# Altium PCB OBDII-Ist.PcbDoc
Units mm, origin at the board's own origin, x right, y up, seen from the top; angles counter-clockwise.
Board outline 40.1 x 40.1 mm, 2 copper layers (Top, Bottom); 68 components, 62 nets, 280 pads, 52 vias.
Unrouted connection lines stored in the file: 5.
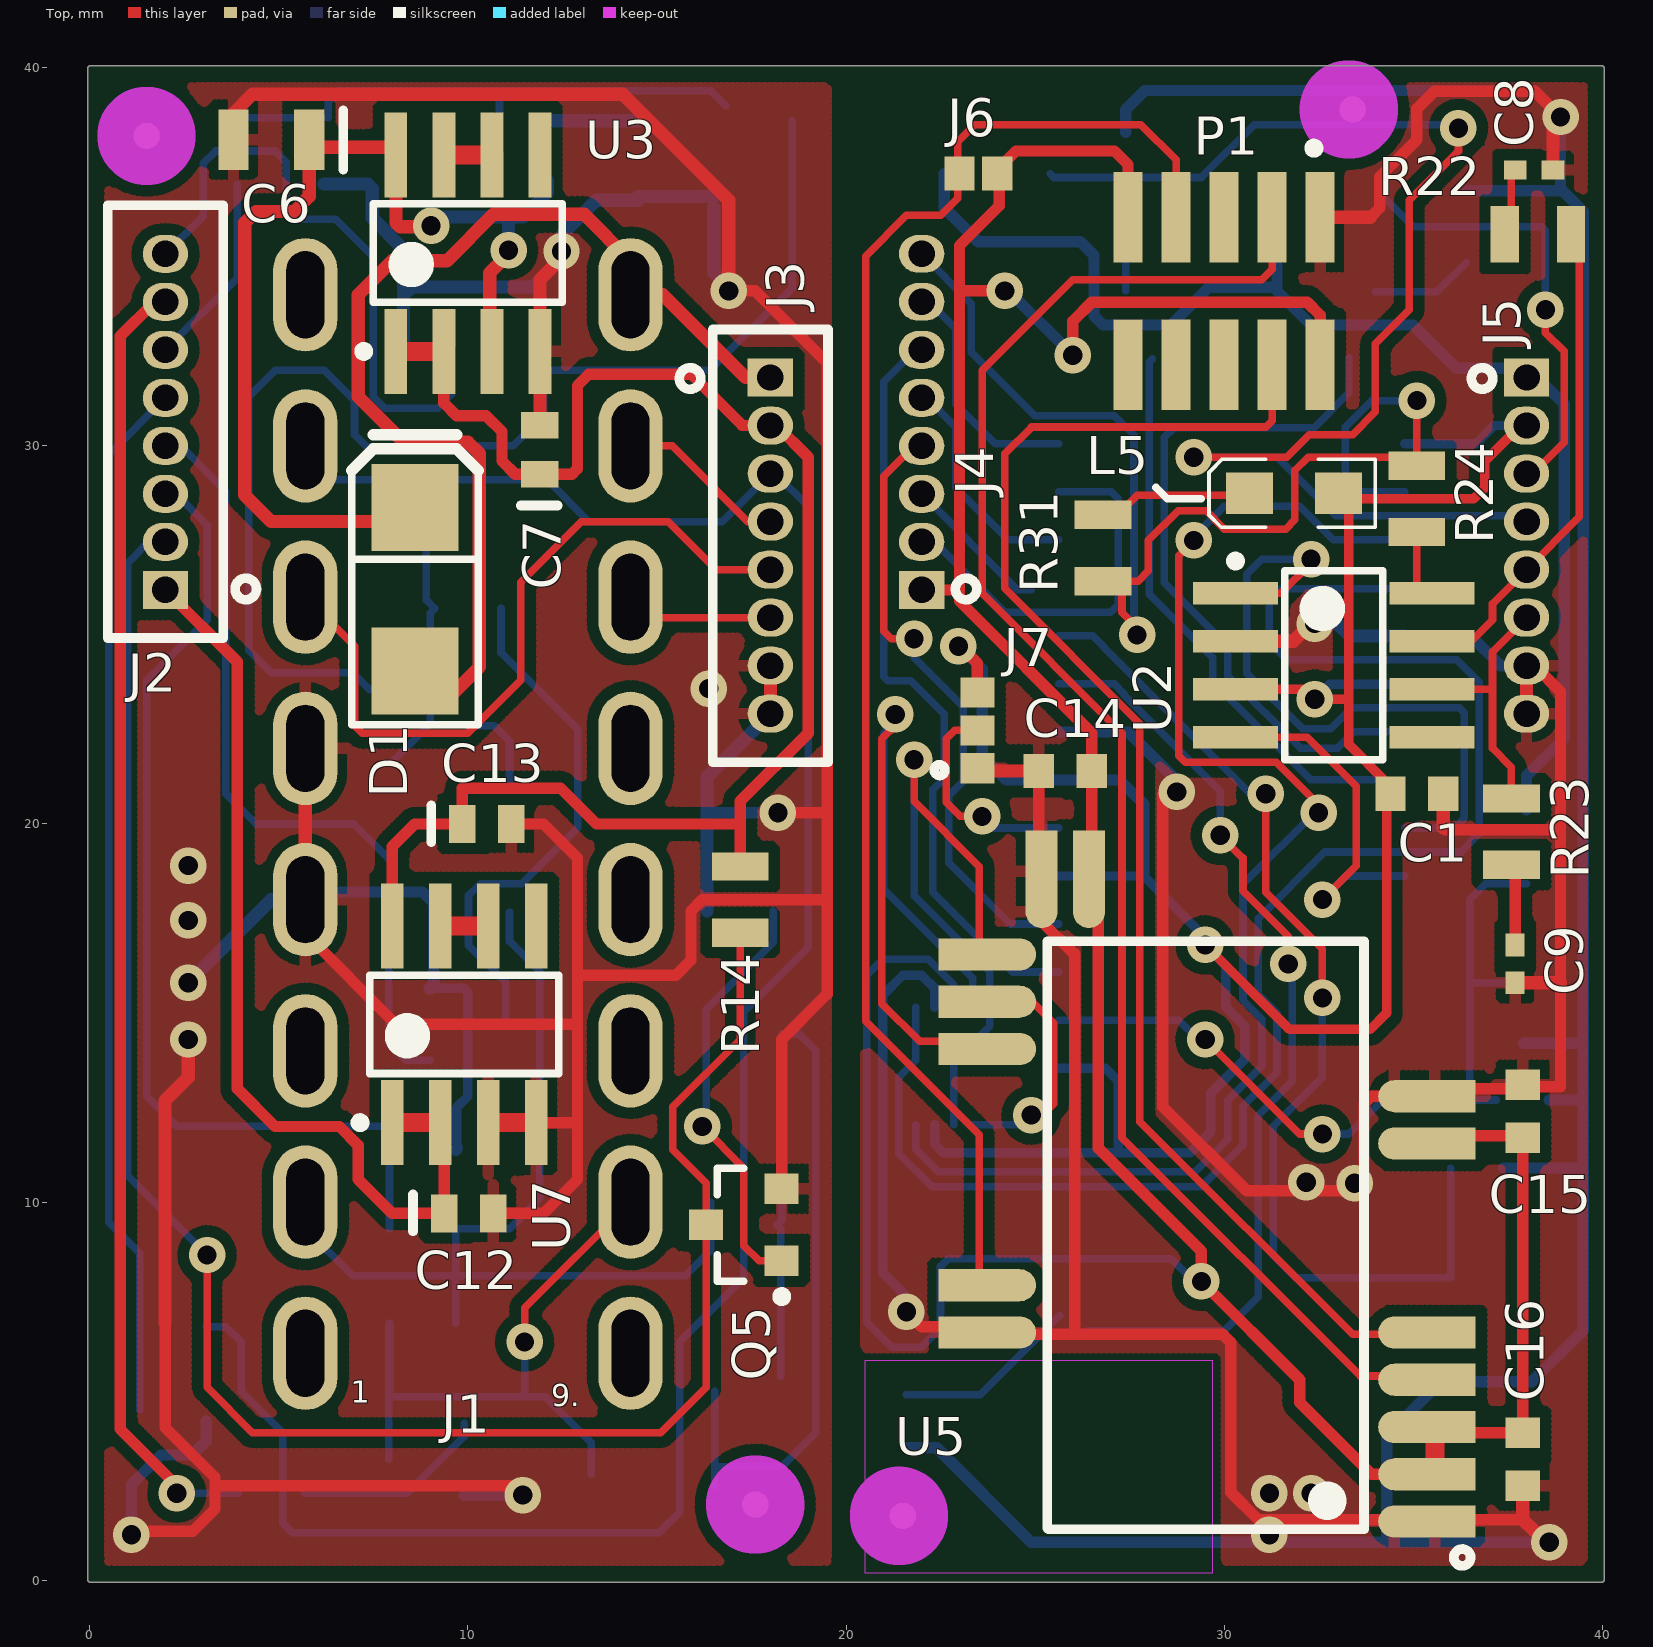
[diagram p0: Top view]
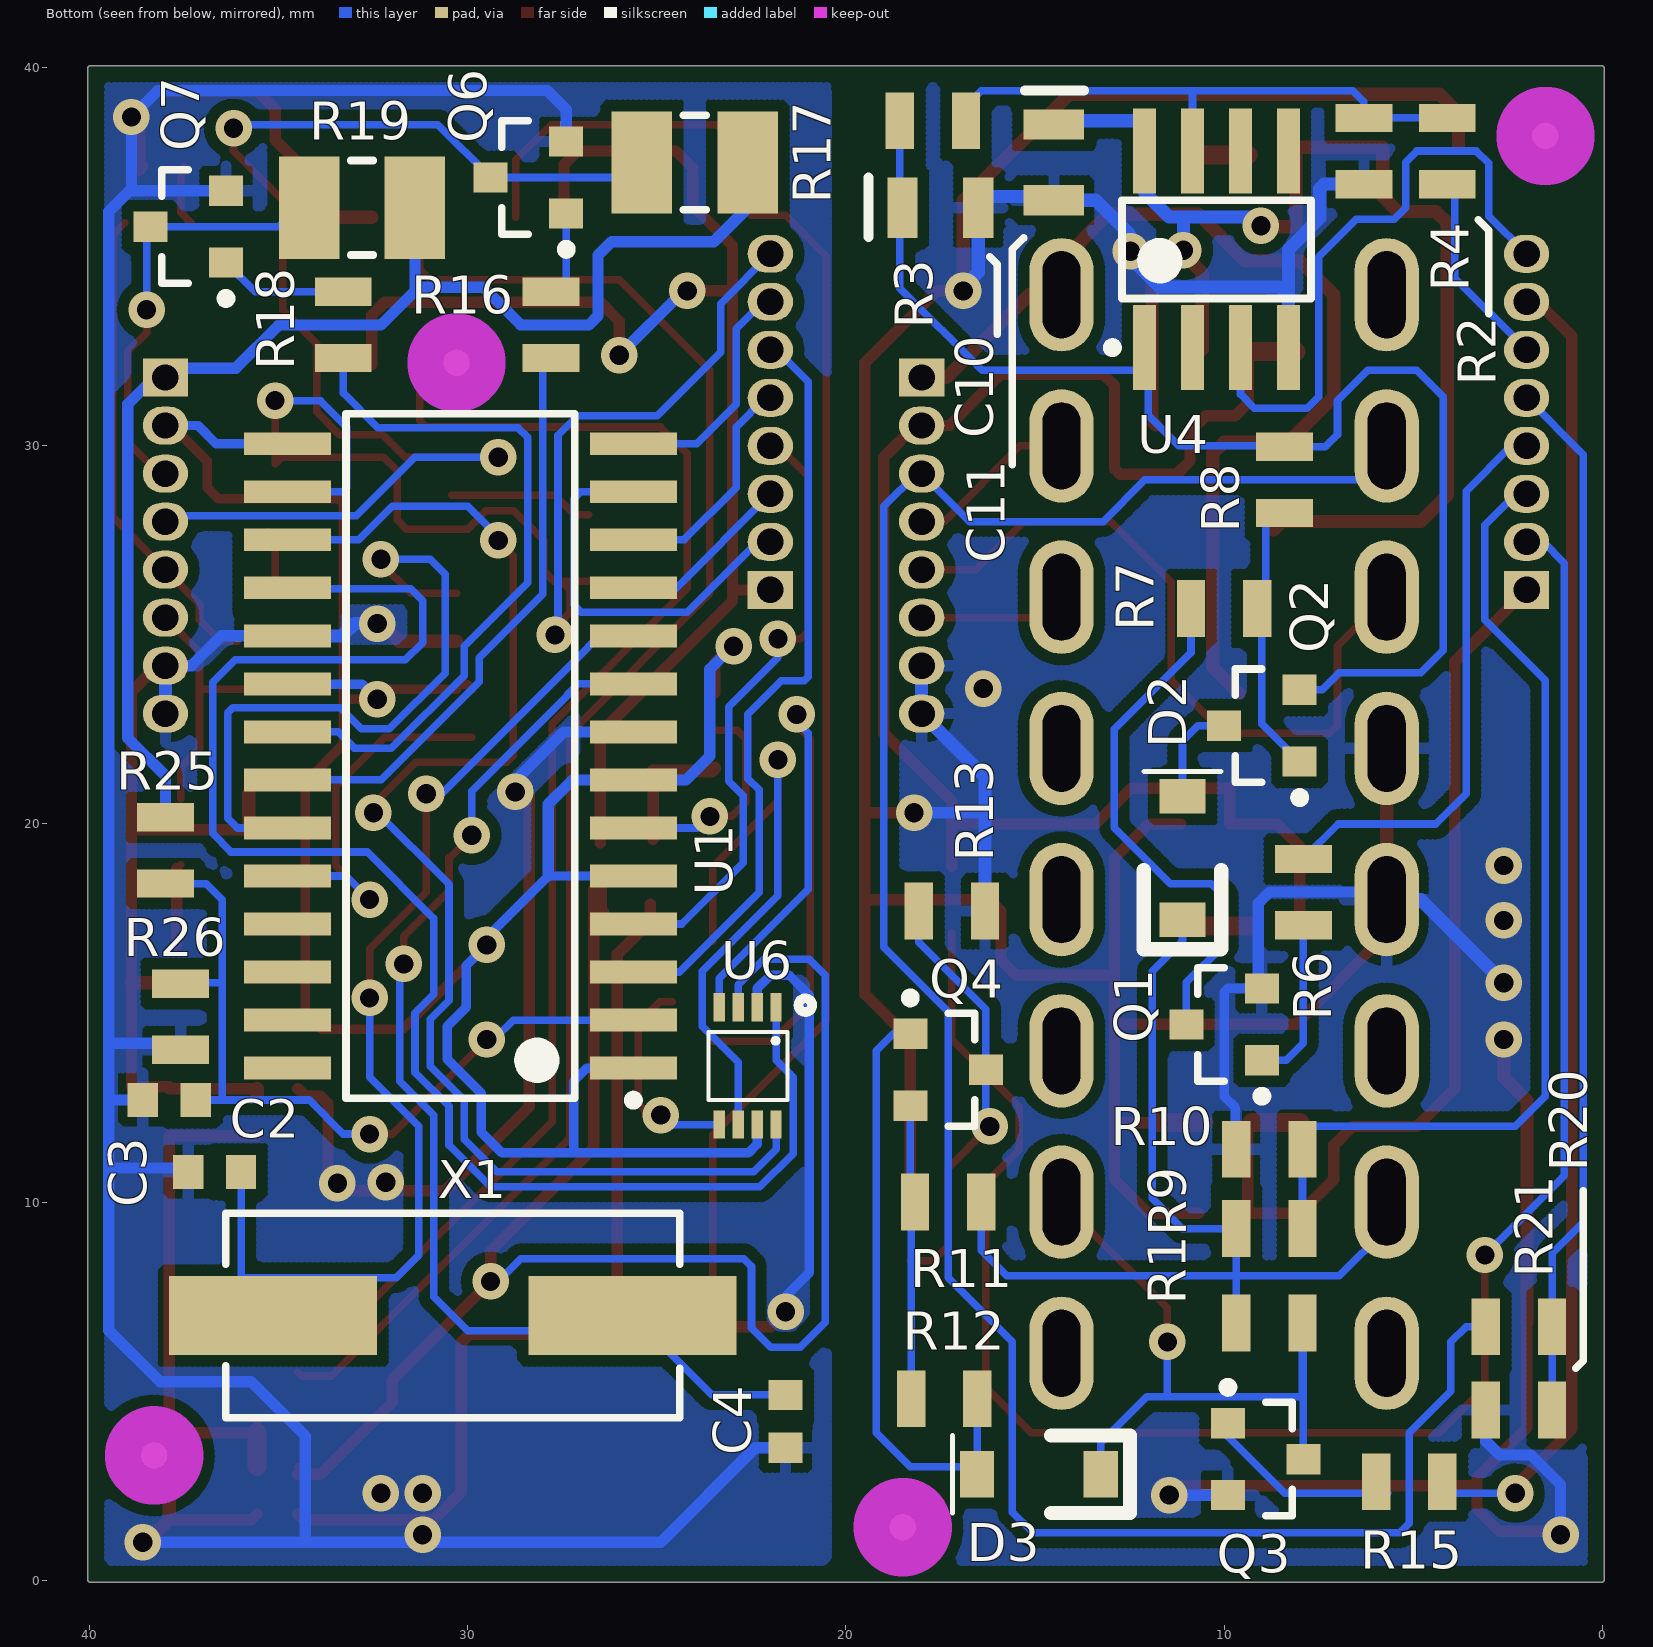
[diagram p1: Bottom view, seen from below]

## Layer stack, top to bottom
Top: signal copper 0.0356
Dielectric: core 0.32, FR-4, Dk 4.8
Bottom: signal copper 0.0356

## Board outline
0,-0.05 cw(c0,0) -0.05,0 -0.05,40 cw(c0,40) 0,40.05 40,40.05 cw(c40,40) 40.05,40 40.05,0 cw(c40,0) 40,-0.05

## Design rules (kind name [scope] priority, off if disabled: settings)
Clearance Clearance_PoligonGND_All [--InPoly vs --(IsPad Or IsTrack or IsVia  Or IsArc)] p1: gap=0.3
Clearance [All] p2: gap=0.2
PlaneConnect [All] p1: planeconnectstyle=Relief reliefexpansion=0.508 reliefentries=4 reliefconductorwidth=0.3 reliefairgap=0.3
PolygonConnect PolygonConnect_1 [IsVia vs InNet('GND')] p1: connectstyle=Direct reliefconductorwidth=0.254 reliefentries=4 polygonreliefangle="90 Angle" airgapwidth=0.254
PolygonConnect [All] p2: connectstyle=Relief reliefconductorwidth=0.3 reliefentries=4 polygonreliefangle="90 Angle" airgapwidth=0.254
RoutingVias [All] p1: holewidth=0.711 width=1.27 viastyle="Through Hole" minholewidth=0.711 minwidth=1.27 maxholewidth=0.711 maxwidth=1.27
SilkscreenOverComponentPads [All] p1: minsilkscreentomaskgap=0.254
SolderMaskExpansion [All] p1: expansion=0.102
Width Width_+5V [InNet('+5V')] p1: maxlimit=0.3 minlimit=0.2 preferedwidth=0.3
Width Width_12V [InNet('+12V')] p2: maxlimit=0.35 minlimit=0.2 preferedwidth=0.35
Width Width_GND [InNet('GND')] p3: maxlimit=0.35 minlimit=0.2 preferedwidth=0.35
Width Width_VBAT [InNet('VBAT')] p4: maxlimit=0.35 minlimit=0.2 preferedwidth=0.35
Width [All] p5: maxlimit=0.3 minlimit=0.2 preferedwidth=0.2
26 further rules are at their usual default settings.

## Classes and differential pairs
component class Power_: C6 C7 C10 C11 C12 C13 D1 D2 D3 J1 J2 J3 Q1 Q2 Q3 Q4 Q5 R1 R2 R3 R4 R6 R7 R8 R9 R10 R11 R12 R13 R14 R15 R20 R21 U3 U4 U7
component class OBDII-Ist: C1 C2 C3 C4 C8 C9 C14 C15 C16 J4 J5 J6 J7 L5 P1 Q6 Q7 R16 R17 R18 R19 R22 R23 R24 R25 R26 R31 U1 U2 U5 U6 X1

## Components (designator, comment, footprint, x,y, rotation, side; value= is the part's Value field where it differs from the comment)
C1 "0.1uF 16V" 1608[0603] 35.1,20.8 r0 top
C2 "0.1uF 16V" 1608[0603] 37.9,12.7 r0 bottom
C3 "27pF 50V" 1608[0603] 36.7,10.8 r0 bottom
C4 "27pF 50V" 1608[0603] 21.6,4.2 r270 bottom
C6 "1uF 50V" C1005 4.8,38.103 r180 top
C7 "2.2uF 16V" C0603 11.9,29.9 r90 top
C8 "560pF 50V" 0402 38.2,37.3 r180 top
C9 "560pF 50V" 0402 37.7,16.3 r90 top
C10 "4.7uF 16V" C1005 17.504,36.3 r180 bottom
C11 "1uF 50V" C1005 14.5,37.5 r270 bottom
C12 "2.2uF 16V" C0603 10.021,9.7 r0 top
C13 "1uF 16V" C0603 10.5,20 r0 top
C14 "1uF 16V" 1608[0603] 25.8,21.4 r180 top
C15 "1uF 16V" 1608[0603] 37.9,12.4 r270 top
C16 "1uF 16V" 1608[0603] 37.9,3.2 r90 top
D1 "FM4001W-W" SMA,2.8mm 8.6,26.2 r90 top
D2 "MMSD4148T1G" SOD123 11.1,19.1 r270 bottom
D3 "MMSD4148T1G" SOD123 14.9,2.8 r180 bottom
J1 "DEV-09911" "DEV-09911 - II" 10,20 r270 top
J2 "M52-040023V2045" M52-040023V2045 2,30 r90 top
J3 "M52-040023V2045" M52-040023V2045 18,28 r270 top
J4 "M52-040023V2045" M52-040023V2045_hols 22,30 r90 top
J5 "M52-040023V2045" M52-040023V2045_hols 38,28 r270 top
J6 "Jumper" Jumper 23.5,37.2 r180 top
J7 "Jumper-3" Jumper-3 23.475,22.475 r90 top
L5 "APT2012SYCK" LED-0805 31.85,28.75 r180 top
P1 "#NAME?" 20021521-00010T1LF 30,34.1 r0 top
Q1 "MMBT3904LT1G" SOT23 10,14.7 r0 bottom
Q2 "MMBT3906LT1G" SOT23 9,22.6 r0 bottom
Q3 "MMBT3904LT1G" SOT23 8.9,3.2 r180 bottom
Q4 "MMBT3906LT1G" SOT23 17.3,13.5 r180 bottom
Q5 "MMBT3904LT1G" SOT23 17.3,9.4 r180 top
Q6 "MMBT3904LT1G" SOT23 28.4,37.1 r0 bottom
Q7 "MMBT3904LT1G" SOT23 37.4,35.8 r0 bottom
R1 "22k 0.125" ERA-0805 8.8,6.8 r0 bottom
R2 "47k 0.125" ERA-0805 4.1,37.8 r90 bottom
R3 "22k 0.125" ERA-0805 17.7,38.6 r0 bottom
R4 "4.7k 0.125" ERA-0805 6.3,37.8 r90 bottom
R6 "4.7k 0.125" ERA-0805 7.9,18.2 r90 bottom
R7 "4.7k 0.125" ERA-0805 10,25.7 r0 bottom
R8 "10k 0.125" ERA-0805 8.4,29.1 r90 bottom
R9 "10k 0.125" ERA-0805 8.8,9.3 r0 bottom
R10 "22k 0.125" ERA-0805 8.8,11.4 r180 bottom
R11 "10k 0.125" ERA-0805 17.3,10 r0 bottom
R12 "47k 0.125" ERA-0805 17.4,4.8 r0 bottom
R13 "10k 0.125" ERA-0805 17.2,17.7 r180 bottom
R14 "4.7k 0.125" ERA-0805 17.2,18 r270 top
R15 "4.7k 0.125" ERA-0805 5.1,2.6 r180 bottom
R16 "2.2k 0.125" ERA-0805 27.8,33.2 r270 bottom
R17 "510R 0.5" ERJ-1210 24,37.5 r180 bottom
R18 "2.2k 0.125" ERA-0805 33.3,33.2 r270 bottom
R19 "510R 0.5" ERJ-1210 32.8,36.3 r180 bottom
R20 "47k 0.125" ERA-0805 2.2,6.7 r0 bottom
R21 "33k 0.125" ERA-0805 2.2,4.5 r180 bottom
R22 "100R 0.125" ERA-0805 38.3,35.6 r0 top
R23 "100R 0.125" ERA-0805 37.6,19.8 r90 top
R24 "4.7k 0.125" ERA-0805 35.1,28.6 r90 top
R25 "47k 0.125" ERA-0805 38,19.3 r90 bottom
R26 "10k 0.125" ERA-0805 37.6,14.9 r90 bottom
R31 "470R 0.125" ERA-0805 26.8,27.3 r90 top
U1 "ELM327SM" SOIC-28N 30.2,21.8 r0 bottom
U2 "MCP2551-I/SN" SOIC8N 32.9,24.2 r0 top
U3 "LP2954IM/NOPB" SOIC8N 10,35.1 r90 top
U4 "LP2951ACM-3.3/NOPB" SOIC8N 10.2,35.2 r90 bottom
U5 "BLE112-A" "BLE112-A - II" 29.6,9.1 r180 top
U6 "TXB0102DCUR" TXB0102DCUR 22.6,13.6 r270 bottom
U7 "LP2951ACM-3.3/NOPB" SOIC8N 9.9,14.7 r90 top
X1 "ABLS-4.000MHZ-B2-T" HC-49/US 30.4,7 r180 bottom

## Footprints (in the part's own frame and the unit in brackets; to place one, negate y for a bottom-side part, rotate by r counter-clockwise, add the part's x,y. Pads: shape width x height; smd on the part's side, far side on the other; paste and mask are expansions set on the pad)
0402 [mm] "Chip Capacitor, Body 1.0x0.5mm, IPC High Density"
  rect 0.6x0.5 smd: 1(-0.5,0) 2(0.5,0)
  body extent -0.55,-0.3 0.55,0.3, height 1.3
1608[0603] [mm] "Chip Capacitor, Body 1.6x0.8mm, IPC High Density"
  rect 0.8x0.9 smd: 1(-0.7,0) 2(0.7,0)
  body extent -0.87,-0.48 0.87,0.48, height 1.3
20021521-00010T1LF [mm] "Connector"
  rect 0.76x2.4 smd: 1(2.54,1.95) 2(2.54,-1.95) 3(1.27,1.95) 4(1.27,-1.95) 5(0,1.95) 6(0,-1.95) 7(-1.27,1.95) 8(-1.27,-1.95) 9(-2.54,1.95) 10(-2.54,-1.95)
  silkscreen extent 2.25,3.65 2.5,3.9, body extent -6.25,-2.25 6.25,2.25, height 0.9
"BLE112-A - II" [mm] "BLE112 Bluetooth Smart Module"
  rect 2.15x0.85 smd: 1(-5.975,7.55) 2(-5.975,6.3) 3(-5.975,5.05) 4(-5.975,3.8) 5(-5.975,2.55) 9(-5.975,-2.45) 10(-5.975,-3.7) 22(6.075,-7.45) 23(6.075,-6.2) 24(6.075,-4.95) 29(6.075,1.3) 30(6.075,2.55)
  round 0.85 smd: 1(-4.9,7.55) 2(-4.9,6.3) 3(-4.9,5.05) 4(-4.9,3.8) 5(-4.9,2.55) 9(-4.9,-2.45) 10(-4.9,-3.7) 20(3.175,-8.575) 21(4.425,-8.575) 22(5,-7.45) 23(5,-6.2) 24(5,-4.95) 29(5,1.3) 30(5,2.55)
  rect 0.85x2.15 smd: 20(3.175,-9.65) 21(4.425,-9.65)
  silkscreen extent -6.92,-7.8 4.27,8.72, body extent -5.98,-9.65 6.08,8.45, height 2.3
C0603 [mm] "Chip Capacitor, Body 1.6x0.8mm, IPC High Density"
  rect 0.7x1 smd: 1(-0.65,0) 2(0.65,0)
  silkscreen extent -1.48,-0.48 -1.48,0.5, body extent -0.87,-0.48 0.87,0.48, height 0.91
C1005 [mm] "Chip Capacitor, Body 1.6x0.8mm, IPC High Density"
  rect 0.8x1.6 smd: 1(-1,0) 2(1,0)
  silkscreen extent -1.9,-0.77 -1.9,0.8, body extent -1.2,-0.72 1.2,0.72, height 1.11
"DEV-09911 - II" [mm] "OBD-II Connector"
  oval 3x1.7 hole 1 slot 2.3 at 0 deg: 1(14,-4.3) 2(10,-4.3) 3(6,-4.3) 4(2,-4.3) 5(-2,-4.3) 6(-6,-4.3) 7(-10,-4.3) 8(-14,-4.3) 9(14,4.3) 10(10,4.3) 11(6,4.3) 12(2,4.3) 13(-2,4.3) 14(-6,4.3) 15(-10,4.3) 16(-14,4.3)
  body extent -14.85,-4.7 14.85,4.7, height 4.1
ERA-0805 [mm] "Chip Resistor; Body 2 x 1.25 mm"
  rect 0.75x1.5 smd: 1(-0.875,0) 2(0.875,0)
  body extent -1,-0.63 1,0.63, height 0.5
ERJ-1210 [mm] "Chip Resistor; Body 3.2 x 2.5 mm (LxW typ)"
  rect 1.6x2.7 smd: 1(-1.4,0) 2(1.4,0)
  silkscreen extent -0.3,-1.25 0.3,1.25
HC-49/US [mm]
  rect 5.5x2.1 smd: 1(-4.75,0) 2(4.75,0)
  silkscreen extent -6,-2.7 6,2.7, body extent -5.7,-2.4 5.7,2.4, height 4.3
Jumper [mm] "Solder Jumper"
  rect 0.8x0.9 smd: 1(-0.5,0) 2(0.5,0)
Jumper-3 [mm] "Solder Jumper"
  rect 0.8x0.9 smd: 1(-1,0) 2(0,0) 3(1,0)
  silkscreen extent -1.19,0.86 -0.91,1.14
LED-0805 [mm] "LED, Body 2 x 1.25 mm"
  rect 1.25x1.1 smd: 1(-1.175,0) 2(1.175,0)
  silkscreen extent -2.15,-0.9 2.25,0.9, body extent -1,-0.63 1,0.63, height 0.75
M52-040023V2045 [mm] "CONN HEADER .050\" 50POS PCB GOLD"
  rect 1x1.2 hole 0.7: 1(-3.81,0)
  oval 1x1.2 hole 0.7: 2(-2.54,0) 3(-1.27,0) 4(0,0) 5(1.27,0) 6(2.54,0) 7(3.81,0) 8(5.078,0)
  silkscreen extent -5.08,-2.41 6.37,1.52, body extent -4.64,-1.1 5.92,1.1, height 5.21
M52-040023V2045_hols [mm] "CONN HEADER .050\" 50POS PCB GOLD"
  rect 1x1.2 hole 0.7: 1(-3.81,0)
  oval 1x1.2 hole 0.7: 2(-2.54,0) 3(-1.27,0) 4(0,0) 5(1.27,0) 6(2.54,0) 7(3.812,0) 8(5.082,0)
  silkscreen extent -4.07,-1.46 -3.5,-0.89, body extent -4.01,-0.2 4.01,0.2, height 5.21
SMA,2.8mm [mm] "DO-214AC/SMA"
  rect 2.3x2.3 smd: 1(-2.15,0) 2(2.175,0)
  silkscreen extent -3.57,-1.68 4.1,1.68, body extent -2.6,-1.3 2.6,1.3, height 2.39
SOD123 [mm] "Diode SOD123, Gull-wing"
  rect 0.91x1.22 smd: 1(-1.635,0) 2(1.635,0)
  silkscreen extent -2.29,-1.02 2.41,1.02, body extent -1.85,-0.8 1.85,0.8, height 1.27
SOIC8N [mm] "SOIC, 8-Leads, Body 5.0x4.0mm (max), Pitch 1.27mm, IPC Medium Density"
  rect 2.25x0.6 smd: 1(-2.6,1.905) 2(-2.6,0.635) 3(-2.6,-0.635) 4(-2.6,-1.905) 5(2.6,-1.905) 6(2.6,-0.635) 7(2.6,0.635) 8(2.6,1.905)
  silkscreen extent -2.72,-2.5 1.3,2.88, body extent -2,-2.5 2,2.5, height 1.75
SOIC-28N [mm] "SOIC, 28-Leads, Body 18.1x7.6mm (max), Pitch 1.27mm, IPC Medium Density"
  rect 2.3x0.6 smd: 1(-4.575,8.255) 2(-4.575,6.985) 3(-4.575,5.715) 4(-4.575,4.445) 5(-4.575,3.175) 6(-4.575,1.905) 7(-4.575,0.635) 8(-4.575,-0.635) 9(-4.575,-1.905) 10(-4.575,-3.175) 11(-4.575,-4.445) 12(-4.575,-5.715) 13(-4.575,-6.985) 14(-4.575,-8.255) 15(4.575,-8.255) 16(4.575,-6.985) 17(4.575,-5.715) 18(4.575,-4.445) 19(4.575,-3.175) 20(4.575,-1.905) 21(4.575,-0.635) 22(4.575,0.635) 23(4.575,1.905) 24(4.575,3.175) 25(4.575,4.445) 26(4.575,5.715) 27(4.575,6.985) 28(4.575,8.255)
  silkscreen extent -4.7,-9.05 3.03,9.23, body extent -3.79,-9.04 3.8,9.04, height 2.64
SOT23 [mm] "SOT23, 3-Leads, Body 3.0x2.6mm, Pitch 0.95mm"
  rect 0.9x0.8 smd: 1(-1,0.95) 2(-1,-0.95) 3(1,0)
  silkscreen extent -1.12,-1.5 0.7,2.02, body extent -1.25,-1.46 1.23,1.46, height 1.01
TXB0102DCUR [mm] "2-Bit Bidirectional Voltage-Level Translator with Auto Direction Sensing and +/-15-kV ESD Protect"
  rect 0.75x0.3 smd mask+0.04: 1(-1.55,0.75) 2(-1.55,0.25) 3(-1.55,-0.25) 4(-1.55,-0.75) 5(1.55,-0.75) 6(1.55,-0.25) 7(1.55,0.25) 8(1.55,0.75)
  silkscreen extent -1.79,-1.04 0.9,1.71, body extent -1.2,-1.05 1.2,1.05, height 0.9

## Part data
C1 C2: library part GRM188R61C104KA01D, "Surface-Mount Ceramic Multilayer Capacitor, 0.1uF, X5R, 10% Tolerance, 0603 Size, 16V"
C3 C4: library part CC0603JRNPO9BN270, "Surface-Mount Ceramic Multilayer Capacitor, 27pF, 5% Tolerance, 0603 Size, 50V"
C6 C11: library part 298D105X0050P2T, "Surface-Mount Electrolitic Tantalum Capacitor, 1uF, 20% Tolerance, 1005 Size, 50V"
C7 C12: library part 298D225X0016M2T, "Surface-Mount Electrolitic Tantalum Capacitor, 2.2uF, 10% Tolerance, 0603 Size, 16V"
C8 C9: library part C0402C561J5GACTU, "Surface-Mount Ceramic Multilayer Capacitor, 560pF, 5% Tolerance, 0402 Size, 50V"
C10: library part 298D475X0016P2T, "Surface-Mount Electrolitic Tantalum Capacitor, 4.7uF, 20% Tolerance, 1005 Size, 16V"
C13: library part 298D105X9016M2T, "Surface-Mount Electrolitic Tantalum Capacitor, 1uF, 10% Tolerance, 0603 Size, 16V"
C14 C15 C16: library part C1608X7R1C105K080AC, "Surface-Mount Ceramic Multilayer Capacitor, 1uF, X7R, 10% Tolerance, 0603 Size, 16V"
D1: "1 Amp 50V  Rectifier"
D2 D3: "High Conductance Fast Diode"
J1: library part OBDII_DEV-09911, "OBD-II Connector"
J2 J3: "CONN HEADER .050\" 20POS PCB GOLD"
J4 J5: library part M52-040023V2045_hols, "CONN HEADER .050\" 8POS PCB GOLD"
J6 J7: "Solder Jumper"
L5: "Typical BLUE SiC LED"
P1: library part 20021521-00010T1LF, "Header, 5-Pin, Dual row,SMT SHOULDED"
Q1 Q3 Q5 Q6 Q7: "NPN 3904 General Purpose Amplifier"
Q2 Q4: "PNP 3906 General Purpose Amplifier"
R1 R3 R10: library part ERA-6AEB223V, "Rectangular Thick Film Chip Resistor, 22 kOhm, 0.1% Tolerance, 0805 Size, 0.125 W"
R2 R12 R20 R25: library part ERA-6AEB473V, "Rectangular Thick Film Chip Resistor, 47 kOhm, 0.1% Tolerance, 0805 Size, 0.125 W"
R4 R6 R7 R14 R15 R24: library part ERA-6AEB472V, "Rectangular Thick Film Chip Resistor, 4.7 kOhm, 0.1% Tolerance, 0805 Size, 0.125 W"
R8 R9 R11 R13 R26: library part ERA-6AEB103V, "Rectangular Thick Film Chip Resistor, 10 kOhm, 0.1% Tolerance, 0805 Size, 0.125 W"
R16 R18: library part ERA-6AEB222V, "Rectangular Thick Film Chip Resistor, 2.2 kOhm, 0.1% Tolerance, 0805 Size, 0.125 W"
R17 R19: library part ERJ-14NF5100U, "Rectangular Thick Film Chip Resistor, 510 Ohm, 1% Tolerance, 1210 Size, 0.5 W"
R21: library part ERA-6AEB333V, "Rectangular Thick Film Chip Resistor, 33 kOhm, 0.1% Tolerance, 0805 Size, 0.125 W"
R22 R23: library part ERA-6AEB101V, "Rectangular Thick Film Chip Resistor, 100 Ohm, 0.1% Tolerance, 0805 Size, 0.125 W"
R31: library part ERA-6AEB471V, "Rectangular Thick Film Chip Resistor, 470 Ohm, 0.1% Tolerance, 0805 Size, 0.125 W"
U1: library part ELM327_SOIC, "OBDII Interpreter IC"
U2: "IC TRANSCEIVER CAN HI-SPD 8-SOIC"
U3: "LDO Voltage Regulators  1.2V-29V 0.25A SOIC8"
U4 U7: "LDO Voltage Regulators  1.2V-37V 0.1A SOIC8"
U5: "BLE112 Bluetooth Smart Module"
U6: "2-Bit Bidirectional Voltage-Level Translator with Auto Direction Sensing and +/-15-kV ESD Protect"
X1: "CRYSTAL 4.000 MHZ 18PF SMD"

## Free pads (board coordinates)
  round 0.7 smd mask+0.7: 0(1.5,38.2) 0(17.6,2) 0(21.5,1.7) 0(33.4,38.9)
  round 0.7 smd far side mask+0.7: 0(1.5,38.2) 0(18.5,1.4) 0(30.3,32.2) 0(38.3,3.3)

## Via types
v1: diameter 0.965, hole 0.508, Top to Bottom, tented both sides, 52 vias

## Nets (pads, with @x,y where several pads share a name; then routed paths per layer and width w, separated by ;. In a path a pad name is that pad's centre, name@x,y a point inside that pad or via, vN(x,y) a via of type N, cw(c..) or ccw(c..) an arc to the next point about the centre after c; other vN are vias at no path point)
+3.3V: C12.1 C14.1 C15.2 C16.2 J2.1 J4.1 J6.1 P1.2 P1.9 U5.2 U5.3 U5.9 U5.20 U6.3 U7.1 U7.2 | length 122.1
  Top w0.2: U7.2 U7.2@9.371,11.994 ; J6.1@24.05,37.2 J6.1@24.05,37.35 ; U5.20@26.425,17.675 U5.20@26.425,18.75 ; U5.2@34.4,2.9 U5.2@34.5,3 ; U5.3@35.575,3.9 U5.3@35.575,4.25
  Top w0.3: J2.1 3.9,24.29 3.9,13 4.9,12 6.6,12 7.1,11.5 7.1,10.6 7.995,9.705 C12.1@9.366,9.705 ; C12.1 U7.2@9.371,11.994 ; J4.1 23,26.19 ; J6.1@24.05,37.2 24.05,36.35 23,35.3 23,34.1 ; J6.1@24.05,37.35 24.5,37.8 27.1,37.8 27.46,37.44 P1.9 ; v1(24.2,34.1) 23,34.1 ; v1(26,32.4) 26,33.3 26.5,33.8 32.2,33.8 32.54,33.46 P1.2 ; U5.20@26.425,17.525 U5.20@26.425,17.675 ; U5.20@26.5,19.5 26.5,22.4 23,25.9 23,26.19 ; U5.20@26.675,18.275 26.675,11.425 29.4,8.7 v1(29.4,7.9) 32,5.3 32,4.7 33.9,2.8 U5.2@34.5,2.8 ; U5.3@35.575,3.9 C16.2 37.9,11.75 U5.9@35.575,11.75 ; 23,26.19 23,34.1
  Top w0.5: U7.1 U7.2 ; U5.2@35.575,3 U5.3@35.575,3.9
  Bottom w0.2: J4.1@21.765,25.955 J4.1 ; U6.3 22.85,15.751 22.176,16.425 20.974,16.425 20.55,16.001 20.55,6.828 21.213,6.165 21.987,6.165 22.5,6.678 22.5,8.3 22.7,8.5 28.6,8.5 29.2,7.9 v1(29.4,7.9) ; v1(24.2,34.1) v1@24.3,34.1
  Bottom w0.3: v1@24.3,34.1 v1(26,32.4)
+5V: C1.1 C7.1 C13.1 J3.2 J5.2 J7.3 L5.1 R14.1 U1.1 U1.5 U1.7 U1.15 U1.20 U2.3 U3.1 U3.2 U6.7 U7.8 | length 110.5
  Top w0.25: v1(29.5,16.8) 31.732,14.567 33.867,14.567 34.3,15 34.3,21.1 33.3,22.1 33.3,23.3 ; U2.3@29.9,23.565 30.035,23.7 U2.3@30.3,23.7 ; U2.3 32.135,23.565 v1(32.4,23.3) 33.3,23.3 ; L5.1@33.3,28.525 33.3,23.3 ; L5.1@33.375,28.6 36.6,28.6 36.9,28.9 36.9,29.6 37.84,30.54 J5.2
  Top w0.3: U7.8 7.995,19.4 8.595,20 C13.1 9.85,20.95 12.45,20.95 13.4,20 17.2,20 ; U3.2 9.365,31.135 9.7,30.8 10.478,30.8 10.9,30.378 10.9,29.6 11.25,29.25 12.75,29.25 12.9,29.4 12.9,31.6 13.2,31.9 15.9,31.9 17.26,30.54 J3.2 18.16,30.54 19,29.7 19,22.4 17.2,20.6 17.2,20 ; R14.1 17.2,20 ; v1(22.975,24.7) 23.025,24.7 23.475,24.25 J7.3 ; L5.1@33.3,28.525 L5.1@33.375,28.6
  Top w0.5: U3.1 U3.2
  Bottom w0.25: U6.7 22.35,11.53 22.58,11.3 29.098,11.3 29.65,11.852 29.65,12.883 30.55,13.783 30.55,14.648 30.05,15.148 30.05,16.25 v1(29.5,16.8) 29.7,16.8 27.875,18.625 U1.5 ; U1.1 26.855,13.545 27.2,13.2 27.2,11.4 ; v1(32.4,23.3) 32.8,23.7 34.77,23.7 U1.20 ; U1.15 36.655,30.055 37.14,30.54 J5.2
  Bottom w0.3: v1@23,24.6 23,24.7 23.6,24.1 23.6,21.8 24.235,21.165 U1.7 27.235,21.165 27.875,20.525 27.875,18.625
+12V: C6.1 C11.1 D1.2 U3.3 U3.8 U4.8 | length 30.9
  Top w0.35: U3.8 8.095,35.905 8.2,35.8 v1@9.3,35.8 ; U3.8@8.095,37.9 5.8,37.9 5.8,36.6 5.4,36.2 4.4,36.2 4.1,35.9 4.1,28.7 4.8,28 8.475,28 D1.2@8.7,27.775 ; U3.3 10.575,32.56 10.575,34.575 v1@11.075,35.075
  Bottom w0.35: v1@9.3,35.8 9.071,35.8 9.329,36.058 11,36.058 11.458,36.058 12.105,36.705 U4.8@12.105,37 ; v1@11.075,35.075 11.075,35.983 ; U4.8@12.1,38.6 C11.1@14.5,38.6
  other v1: 11.075,35.175 9.025,35.825
"CAN-H 6": J5.5 R22.2 U2.7 | length 12.8
  Top w0.2: U2.7@36.105,24.835 36.535,24.835 37.1,25.4 37.1,25.83 J5.5 39.4,28.13 39.4,35.575 R22.2@39.075,35.9
CAN-H_P: J1.6 J3.5 | length 19.4
  Top w0.2: J1.6 7,24.7 7,22.6 7.2,22.4 10,22.4 11.4,23.8 11.4,26.4 13,28 15.3,28 16.57,26.73 J3.5
"CAN-L 14": J5.6 R23.2 U2.6 | length 7
  Top w0.2: U2.6 37.065,23.565 37.1,23.6 ; R23.2 37.6,21.5 37.1,22 37.1,23.6 ; J5.6 37.1,24.56 37.1,23.6
CAN-L_P: J1.14 J3.6 | length 3.9
  Top w0.2: J1.14@14.3,25.851 14.691,25.46 J3.6
GND: C1.2 C2.2 C3.2 C4.2 C6.2 C7.2 C8.1 C9.1 C10.2 C11.2 C12.2 C13.2 C14.2 C15.1 C16.1 J1.4 J1.5 J3.7 J3.8 J5.7 J5.8 J7.1 P1.1 Q1.2 Q3.2 Q5.2 Q6.2 Q7.2 R4.1 R10.1 R13.2 R21.1 R26.1 U1.8 U1.19 U2.2 U3.4 U4.4 U5.1 U5.10 U5.21 U5.30 U6.2 U7.3 U7.4 | length 348.2
  Top w0.3: v1(1.1,1.2) 1.19,1.29 2.718,1.29 3.31,1.882 3.31,2.5 ; 1.99,6.8 1.99,4.038 3.31,2.718 3.31,2.5 ; J1.4@5.7,17.1 8.1,14.7 12.9,14.7 ; C12.2 12,9.7 12.9,10.6 12.9,12.1 ; C13.2 12,20 12.9,19.1 12.9,16 ; v1@11.7,2.5 3.31,2.5 ; U7.4 12.9,12.1 ; v1(16.9,34.1) 17.6,34.1 19.5,32.2 19.5,20.3 ; v1(18.2,20.3) 19.5,20.3 ; Q5.2 18.3,14.3 19.5,15.5 19.5,20.3 ; 19.375,18 16.2,18 15.9,17.7 15.9,16.4 15.5,16 12.9,16 ; v1(21.6,7.1) 21.998,6.702 23.477,6.702 U5.30@23.525,6.75 ; U5.30@24.6,6.75 24.85,6.5 29.964,6.5 30.175,6.289 30.175,2.325 30.9,1.6 34.35,1.6 U5.1@34.5,1.75 ; U5.21@25.1,19.6 C14.2 ; U5.21@25.175,17.875 25.175,17.425 26.025,16.575 ; 26.05,6.5 26.05,16.57 ; v1@28.5,20.9 28.375,20.775 28.375,12.525 30.6,10.3 33.3,10.3 33.7,10.7 33.7,12.6 33.9,12.8 34.3,12.8 U5.10@34.5,13 ; 33.871,36.05 34.115,36.294 34.115,37.115 35.1,38.1 35.1,38.918 35.564,39.382 38.218,39.382 v1(38.9,38.7) ; U5.1@35.575,1.75 35.725,1.6 37.9,1.6 ; U5.10@35.575,13 C15.1@37.9,13 ; 35.8,19.9 35.851,19.849 38.9,19.849 ; C15.1@37.9,13.05 38.9,13.05 38.9,15.8 38.9,23.5 J5.7@38.21,24.19 ; C8.1@38.6,37.4 C8.1@38.7,37.5 ; 12.9,12.1 12.9,14.7 ; 12.9,14.7 12.9,16
  Top w0.35: 1.99,6.8 1.99,12.69 2.6,13.3 v1(2.6,14.3) ; C6.2@3.8,37.9 3.8,38.8 4.3,39.3 14.1,39.3 16.9,36.5 v1(16.9,34.1) ; J1.4@5.7,17.1 J1.4 J1.5 ; C7.2@11.8,30.55 11.905,30.655 U3.4 11.905,34.391 v1@12.314,34.8 ; J3.7@17.81,24 J3.7 J3.8 ; J7.1 23.55,21.4 C14.2 ; v1@28.5,20.9 v1@28.75,20.9 ; U2.2 31.835,24.835 32.4,25.4 v1(32.4,25.3) ; P1.1 33.871,36.05 ; U5.10@35.575,12.8 U5.10@35.575,13 ; 35.8,19.9 C1.2 ; C9.1 38.9,15.8 ; C16.1 37.9,1.6 38.2,1.3 ; J5.8 J5.7 ; C8.1 38.7,37.5 38.7,38.5 v1(38.9,38.7)
  Top w0.5: U7.3 U7.4
  Bottom w0.25: Q1.2 9.9,15.65 10,15.55 10,12.8 9.7,12.5 R10.1@9.7,11.425 ; v1@21.6,7.5 20.975,8.125 20.975,15.475 21.5,16 22,16 22.35,15.65 U6.2
  Bottom w0.3: v1(1.1,1.2) 1.1,2.528 1.882,3.31 2.71,3.31 3.075,3.675 R21.1@3.075,4.2 ; J1.4@6.2,18.2 8.8,18.2 9.1,17.9 Q1.2@9.1,15.75 ; Q3.2 v1(11.45,2.25) v1@11.7,2.5 ; 16.325,20.3 v1(18.2,20.3) ; C4.2 22.4,3.5 24.9,1 v1(38.6,1) ; U1.8 27.465,22.435 29,20.9 28.8,20.9 v1(28.75,20.85) ; Q6.2@27.4,38.3 27.4,38.9 27.9,39.4 38.2,39.4 v1(38.9,38.7) 38.9,36.8 ; 34.3,1.1 34.3,3.81 35.74,5.25 38.143,5.25 39.5,6.607 39.5,12.7 ; U1.19 36.525,24.975 37.31,24.19 J5.7@38,24.19 ; Q7.2 38.95,36.75 39.5,36.2 39.5,14.2 ; C3.2@37.4,10.9 39.4,10.9 ; R26.1@37.925,14.2 39.5,14.2 ; C2.2 39.5,12.7 ; 39.5,12.7 39.5,14.2
  Bottom w0.35: v1(2.6,15.8) 4.8,18 J1.4 ; R4.1@6.2,36.925 R4.1 7.35,36.925 7.467,36.808 7.467,36.033 8.295,35.205 8.295,33.979 ; U4.4 8.295,33.979 ; Q1.2 Q1.2@9.1,15.75 ; R10.1 R10.1@9.7,11.425 ; v1@12.314,34.8 11.719,34.205 8.521,34.205 8.295,33.979 ; v1@12.5,34.875 12.5,35.6 13.4,36.5 C11.2 ; C11.2@14.5,36.6 C10.2@16.5,36.6 ; R13.2 16.325,20.3 16.325,21.247 J3.8 J3.7 ; C10.2 16.504,34.596 16.9,34.2 v1(16.9,34.1) ; v1(32.4,25.3) 33,25.3 33.325,24.975 U1.19 ; J5.8 J5.7
  other v1: 31.2,1.2 31.2,2.3 32.3,2.3 33.45,10.5 32.175,10.525 2.6,17.449 2.6,18.9 16.368,23.581 12.475,35.15
ISO_IN: J4.5 U1.12 | length 6.1
  Bottom w0.2: J4.5 22.13,31.27 22.9,30.5 22.9,28.9 24.285,27.515 U1.12
ISO_IN_P: J2.5 R20.1 R21.2 | length 27.7
  Bottom w0.2: R21.2 R20.1 1.325,8.645 0.5,9.47 0.5,29.77 J2.5
ISO_K: J5.3 Q7.3 R19.1 | length 12.1
  Top w0.2: J5.3 38.17,29.27 39,30.1 39,32.5 38.5,33 v1@38.5,33.9
  Bottom w0.2: R19.1@34.2,36.6 35,35.8 Q7.3 38.5,35.7 v1(38.5,33.6)
ISO_K_P: J1.7 J3.3 R20.2 | length 59.6
  Bottom w0.2: R20.2 3.6,6.7 4,6.3 4,5 5.1,3.9 5.1,1.5 5.35,1.25 15.05,1.25 15.6,1.8 15.6,6.3 17.3,8 17.3,15.034 19,16.734 19,28.4 18.13,29.27 J3.3 16.73,28 13.2,28 12.1,29.1 J1.7@5.9,29.1
ISO_L: J5.4 Q6.3 R17.1 | length 34.2
  Top w0.2: v1@29.5,29.7 31.659,29.7 32.259,30.3 33.4,30.3 34,30.9 34,32.7 34.9,33.6 34.9,36.5 36.2,37.8 v1@36.2,38.5
  Bottom w0.2: R17.1@25.4,37.2 25.5,37.1 Q6.3 30.8,38.5 36.2,38.5 v1(36.2,38.4) ; v1@29.5,29.7 31.4,29.7 32.95,28.15 J5.4@37.815,28.15 ; J5.4@37.815,28.185 J5.4
  other v1: 29.2,29.7
ISO_L_P: J1.15 J3.4 | length 4.5
  Top w0.2: J1.15 15.4,30 17.4,28 J3.4
J1850_BUS+: J4.4 U1.4 | length 16.5
  Top w0.2: v1(21.8,24.9) 21.2,24.9 21,25.1 21,29.2 21.8,30 J4.4
  Bottom w0.2: v1(21.8,24.9) 21.8,24.4 23.1,23.1 23.1,21.134 22.718,20.752 22.718,18.98 24.342,17.355 U1.4
J1850_BUS+_P: J2.4 R6.2 | length 15.1
  Bottom w0.2: J2.4 2.4,30 3.6,28.8 3.6,20.8 4.4,20 6.975,20 R6.2
J1850_BUS-: J4.7 U1.14 | length 6.4
  Bottom w0.2: J4.7@22,33.81 22.19,33.81 22.9,33.1 22.9,31.1 23.945,30.055 U1.14
J1850_BUS-_P: J2.7 R15.2 | length 34.4
  Top w0.3: J2.7 1.71,33.81 0.8,32.9 0.8,4 v1@2.4,2.4
  Bottom w0.2: v1(2.3,2.3) R15.2@3.925,2.3
J1850_VOLTS: J4.6 U1.3 | length 20.2
  Bottom w0.2: J4.6 21.84,32.54 21,31.7 21,23.9 21.109,23.791 21.709,23.791 22.6,22.9 22.6,21.2 22.3,20.9 22.3,18.2 24.415,16.085 U1.3
J1850_VOLTS_P: J2.6 R2.1 | length 5.2
  Bottom w0.2: J2.6 3.9,34.44 R2.1@3.9,36.925
NetC2_1: C2.1 R25.1 R26.2 U1.2 | length 21.6
  Top w0.2: v1(29.5,14.3) 32,11.8 v1(32.6,11.8)
  Bottom w0.2: U1.2 28.8,14.815 29.315,14.3 v1(29.5,14.3) ; v1(32.6,11.8) 33.3,11.8 34.2,12.7 36.5,12.7 ; 36.5,15.8 R26.2@37.925,15.8 ; C2.1 36.5,12.7 ; R25.1 36.925,18.425 36.5,18 36.5,12.7
NetC3_1: C3.1 U1.10 X1.1 | length 28.4
  Top w0.2: v1(31.1,20.8) 31.1,18.2 32.6,16.7 v1(32.6,15.4)
  Bottom w0.2: U1.10 26.525,24.975 26.818,24.682 26.818,24.676 30.693,20.8 v1(31.1,20.8) ; v1(32.6,15.4) 32.6,13.3 31.3,12 31.3,8.6 31.9,8 36,8 C3.1@36,10.9
NetC4_1: C4.1 U1.9 X1.2 | length 29.8
  Top w0.2: v1(29.9,19.7) 30.5,19.1 30.5,18.234 31.7,17.034 v1(31.7,16.3)
  Bottom w0.2: C4.1 23.55,4.9 X1.2 ; U1.9 27.095,23.705 27.365,23.435 27.365,23.404 29.9,20.869 v1(29.9,19.7) ; X1.2@26.4,6.6 30,6.6 30.9,7.5 30.9,12.3 31.8,13.2 31.8,16.2 v1(31.7,16.3)
NetC8_2: C8.2 R22.1 | length 1.6
  Top w0.2: R22.1@37.325,35.9 37.6,36.175 37.6,37.069 C8.2@37.5,37.4
NetC9_2: C9.2 R23.1 | length 2.2
  Top w0.2: R23.1 R23.1@37.7,18.825
  Top w0.3: C9.2 R23.1@37.7,18.825
NetC10_1: C10.1 Q2.2 R3.2 R8.2 U4.1 | length 35
  Bottom w0.2: Q2.2 7.4,23.55 6.95,24 4.8,24 4.2,24.6 4.2,31.3 4.9,32 6.2,32 7,31.2 7,30.3 7.325,29.975 R8.2 ; R8.2@8.4,29.9 8.475,29.9 8.575,30 11.2,30 12.005,30.805 U4.1@12.005,32.6 ; U4.1 12.105,32 16.4,32 18.575,34.175 R3.2
NetD2_1: D2.1 Q2.3 | length 2.5
  Bottom w0.2: Q2.3 10.693,22.6 11.1,22.193 D2.1@11.1,20.935
NetD2_2: D2.2 J1.2 R1.2 R9.2 R11.1 | length 26.5
  Bottom w0.2: J1.2 5.7,9.3 6.95,8.05 9.675,8.05 ; R1.2 9.675,8.05 ; D2.2@11.1,17.665 11.1,16.9 11.9,16.1 11.9,10.1 11.1,9.3 R9.2 9.675,8.05 ; R11.1 16.425,8.725 15.75,8.05 9.675,8.05
NetD3_1: D3.1 Q4.1 R12.1 | length 16.7
  Bottom w0.2: D3.1@16.525,2.49 R12.1@16.525,5 ; D3.1@16.535,3 18.3,3 19.2,3.9 19.2,14 18.75,14.45 Q4.1
NetD3_2: D3.2 J1.10 Q3.3 R1.1 | length 18.6
  Top w0.2: v1(11.5,6.3) 11.5,7.2 J1.10
  Bottom w0.2: Q3.3 7.9,6.775 R1.1 7.925,4.8 7.975,4.85 11.5,4.85 ; v1(11.5,6.3) 11.5,4.85 ; D3.2 13.265,3.635 12.05,4.85 11.5,4.85
NetJ6_2: J6.2 P1.7 U5.29 | length 40.7
  Top w0.2: U5.29@23.525,8 23.525,11.775 20.518,14.783 20.518,35.017 21.6,36.1 22.5,36.1 22.95,36.55 22.95,37.2 22.95,38.05 23.4,38.5 27.8,38.5 28.73,37.57 P1.7
NetJ7_2: J7.2 U1.6 | length 5.8
  Top w0.2: J7.2 22.875,22.475 22.65,22.25 22.65,20.575 23.025,20.2 v1(23.6,20.2)
  Bottom w0.2: v1@23.625,20.2 23.93,19.895 U1.6
NetL5_2: L5.2 R31.2 | length 3.8
  Top w0.2: R31.2 27.175,28.175 27.7,28.7 L5.2@30.425,28.7
NetP1_3: P1.3 U5.4 | length 41.8
  Top w0.2: P1.3 31.27,34.67 31,34.4 26,34.4 23.6,32 23.6,26.1 27.3,22.4 27.3,11.7 33.6,5.4 34.4,5.4 U5.4@34.5,5.5
NetP1_4: P1.4 U5.5 | length 37.2
  Top w0.2: P1.4 31.27,30.67 31.1,30.5 24.907,30.5 24.2,29.793 24.2,26.231 27.775,22.656 27.775,12.125 33.4,6.5 34.25,6.5 U5.5@34.5,6.75
NetQ1_1: Q1.1 R6.1 | length 4.4
  Bottom w0.2: R6.1 7.9,14.2 8.35,13.75 Q1.1
NetQ1_3: Q1.3 R7.2 | length 14.1
  Bottom w0.2: R7.2 10.875,24.525 12.9,22.5 12.9,19.9 11.422,18.422 10.337,18.422 10.015,18.1 10.015,16.797 11,15.812 Q1.3
NetQ2_1: Q2.1 R7.1 R8.1 | length 7.8
  Bottom w0.2: Q2.1 9,22.65 9,25.575 R7.1 8.9,25.925 8.9,28.425 R8.1@8.4,28.425
NetQ3_1: Q3.1 R15.1 | length 5.2
  Bottom w0.2: R15.1@5.675,2.3 8.4,2.3 9.9,3.8 Q3.1
NetQ4_2: Q4.2 R11.2 R12.2 | length 7.2
  Bottom w0.2: R12.2@18.275,5.4 18.275,9.3 18.175,9.4 18.3,9.525 Q4.2
NetQ4_3: Q4.3 Q5.1 R13.1 | length 11.2
  Top w0.2: v1(16.2,12) 17.3,10.9 17.3,8.85 17.7,8.45 Q5.1
  Bottom w0.2: v1(16.2,12) 16.3,12.1 Q4.3 16.3,15.1 18.075,16.875 R13.1
NetQ6_1: Q6.1 R16.1 | length 2
  Bottom w0.2: R16.1@27.4,34.1 Q6.1
NetQ7_1: Q7.1 R18.1 | length 2.7
  Bottom w0.2: R18.1@34,34.075 35.625,34.075 Q7.1
NetR2_2: R2.2 R3.1 R4.2 U4.7 | length 15.1
  Bottom w0.2: R2.2@3.9,38.675 R2.2 R4.2@6.2,38.675 ; R4.2 6.3,39.1 6.6,39.4 16.425,39.4 R3.1@16.825,39 ; U4.7 10.835,39.4
NetR16_2: R16.2 U1.22 | length 14.7
  Bottom w0.2: R16.2@28.1,32.3 28.018,32.217 28.018,26.083 29.7,24.4 29.7,23.762 32.297,21.165 U1.22@34.1,21.165
NetR18_2: R18.2 U1.21 | length 18.9
  Bottom w0.2: R18.2 33.3,31.4 32.382,30.482 28.676,30.482 28.417,30.224 28.417,26.383 30.1,24.7 30.1,23.928 32.028,22 33,22 33.435,22.435 U1.21
NetR24_1: R24.1 U2.8 | length 1.7
  Top w0.2: U2.8@35.1,26.105 35.1,27.525 R24.1@35.3,27.725
NetU1_17: U1.17 U6.8 | length 36.3
  Top w0.2: v1(29.2,27.5) 28.8,27.1 28.8,21.8 28.968,21.632 31.374,21.632 32.5,20.507 v1(32.5,20.3)
  Bottom w0.2: U6.8 21.85,11.394 22.444,10.8 29.234,10.8 30.1,11.666 30.1,12.697 31,13.597 31,14.834 30.5,15.334 30.5,18.4 v1@32.45,20.35 ; v1(29.2,27.5) 29.2,27.6 30,28.4 32.007,28.4 32.892,27.515 U1.17
NetU1_18: U1.18 U6.1 | length 42.1
  Bottom w0.2: U6.1 21.85,13.75 21.4,13.3 21.4,11.278 22.278,10.4 29.4,10.4 30.5,11.5 30.5,12.531 31.4,13.431 31.4,15 30.9,15.5 30.9,17.5 32.66,19.26 36.27,19.26 ; U1.18 34.747,26.217 31.518,26.217 31.2,25.9 31.2,24.8 31.66,24.34 36.16,24.34 36.754,23.746 36.754,19.754 36.27,19.27
NetU1_23: U1.23 U2.1 | length 18
  Top w0.2: U2.1 31.505,26.105 32.3,26.9 v1(32.3,27)
  Bottom w0.2: v1(32.3,27) 31,27 30.6,26.6 30.6,23.993 32.076,22.517 32.817,22.517 33.375,23.075 36.225,23.075 36.354,22.946 36.354,20.154 36.095,19.895 U1.23
NetU1_24: U1.24 U2.4 | length 9.9
  Top w0.2: U2.4@29.9,22.295 32.205,22.295 33.5,21 33.5,18.9 v1(32.6,18)
  Bottom w0.2: v1(32.6,18) 33.225,18.625 U1.24
NetU3_6: U3.6 U3.7 | length 1.3
  Top w0.5: U3.7 U3.6
NetU5_22: U5.22 U6.6 | length 15.9
  Top w0.2: 21.8,21.2 21.8,20.6 23.525,18.875 U5.22@23.525,16.9
  Bottom w0.2: v1(21.8,21.7) 21.8,18.1 23.8,16.1 23.8,14.651 22.85,13.701 U6.6
NetU5_23: U5.23 U6.5 | length 5.6
  Top w0.2: U5.23@24.6,15.3 24.925,15.3 25.5,14.725 25.5,12.6 v1@25.2,12.3
  Bottom w0.2: U6.5 24.95,12.05 v1@25.2,12.3
  other v1: 24.9,12.3
NetU5_24: U5.24 U6.4 | length 19.1
  Top w0.2: v1@21.3,22.6 20.95,22.25 20.95,15.25 21.95,14.25 U5.24@23.525,14.25
  Bottom w0.2: v1@21.3,22.6 21.2,22.6 21,22.4 21,18.269 23.35,15.919 U6.4
  other v1: 21.3,22.9
NetU7_6: U7.6 U7.7 | length 1.3
  Top w0.5: U7.7 U7.6
PWM_IN: J4.2 U1.13 | length 10.5
  Bottom w0.2: J4.2 22.34,27.46 24.2,25.6 27,25.6 27.2,25.8 27.2,28.6 27.015,28.785 U1.13
PWM_IN_P: J2.2 Q5.3 R14.2 | length 51.2
  Top w0.2: v1(3.1,8.6) 3.1,5.1 4.3,3.9 15.1,3.9 16.3,5.1 Q5.3 16.3,10.5 15.418,11.382 15.418,12.518 17.2,14.3 R14.2
  Bottom w0.2: J2.2 1.56,27.46 1,26.9 1,10.7 v1(3.1,8.6)
SHUTD: J2.8 J4.8 R24.2 R31.1 U1.16 U4.3 | length 50.5
  Top w0.2: R31.1 R31.1@27.525,26.425 ; v1(27.7,25) 27.7,25.2 27.3,25.6 27.3,26.2 R31.1@27.525,26.425 ; v1(35.1,31.2) 35.1,29.525 34.925,29.7 32.225,29.7 31.875,29.35 31.875,28.05 31.625,27.8 30,27.8 29.983,27.817 29.983,27.824 29.524,28.283 28.783,28.283 28,27.5 28,26.7 27.725,26.425 R31.1@27.525,26.425
  Bottom w0.2: J2.8 3,36.078 3,37.474 3.326,37.8 4.9,37.8 5.2,37.5 5.2,36.3 5.5,36 6.5,36 7.5,35 7.5,31.3 7.8,31 9.2,31 9.565,31.365 U4.3 ; J4.8 23.317,33.764 23.317,32.476 24.993,30.8 27.1,30.8 27.618,30.282 27.618,25.082 v1(27.7,25) ; U1.16 33.315,28.785 33.2,28.9 33.2,30.5 33.9,31.2 34.8,31.2 v1@35.1,31.5
VBAT: D1.1 J1.16 J3.1 J5.1 R17.2 R19.2 R25.2 | length 61.4
  Top w0.35: D1.1@9.6,23.45 10.3,24.15 10.3,29.8 10,30.1 8.3,30.1 7.1,31.3 7.1,34 8,34.9 9.45,34.9 10.675,36.125 13.075,36.125 14.3,34.9 J1.16 15.151,34 17.341,31.81 J3.1
  Bottom w0.3: R17.2@22.6,37.2 22.6,36.3 23.5,35.4 26.2,35.4 26.558,35.043 26.558,33.442 26.8,33.2 28.6,33.2 29.6,34.2 31.4,34.2 ; R19.2@31.4,35.9 31.4,34.1 32.3,33.2 35,33.2 36.142,32.058 J5.1@37.752,32.058 ; R25.2@38,20.375 38,21.275 39,22.275 39,31.1 38.29,31.81 J5.1
  Bottom w0.35: J5.1@37.752,32.058 J5.1
VPW_IN: J4.3 U1.11 | length 3.9
  Bottom w0.2: J4.3 24.53,26.2 U1.11@24.9,26.2
VPW_IN_P: J2.3 R9.1 R10.2 | length 26.6
  Bottom w0.2: J2.3 2.27,28.73 3.1,27.9 3.1,25.4 1.5,23.8 1.5,12.8 2.3,12 7.8,12 7.925,11.875 R10.2 R9.1
pads on no net: J1.1 J1.3 J1.8 J1.9 J1.11 J1.12 J1.13 P1.5 P1.6 P1.8 P1.10 U1.25 U1.26 U1.27 U1.28 U2.5 U3.5 U4.2 U4.5 U4.6 U7.5

## Polygon pours and split planes (outlines as drawn)
GND on Top "GND" (hatched 45Degree grid 0.1 track 0.25, remove dead copper, pour order 9): 0.5,0.5 19.5,0.5 19.5,39.5 0.5,39.5
GND on Top "GND" (hatched 45Degree grid 0.1 track 0.25, remove dead copper, pour order 4): 39.5,0.5 20.5,0.5 20.5,39.5 39.5,39.5
GND on Bottom "GND" (hatched 45Degree grid 0.1 track 0.25, remove dead copper, pour order 11): 19.5,39.5 19.5,0.5 0.5,0.5 0.5,39.5
GND on Bottom "GND" (hatched 45Degree grid 0.1 track 0.25, remove dead copper, pour order 8): 39.5,0.5 20.6,0.5 20.5,0.6 20.5,39.5 39.5,39.5

## Keep-outs
Top:
  circle w2.4: c21.4,1.7 r0.1
  circle w2.4: c17.6,2 r0.1
  circle w2.4: c1.5,38.2 r0.1
  circle w2.4: c33.3,38.9 r0.1
  rectangle: 20.5,0.2 29.7,5.8
Bottom:
  circle w2.4: c30.3,32.2 r0.1
  circle w2.4: c18.5,1.4 r0.1
  circle w2.4: c38.3,3.3 r0.1
  circle w2.4: c1.5,38.2 r0.1

## Silkscreen, mask and mechanical layers (free items; w line width, h text height)
Top Overlay:
  lines w0.2: 28.2,28.9 28.5,28.6 29.4,28.6
Bottom Overlay:
  lines w0.2: 0.5,10.3 0.5,5.8 0.7,5.6 ; 3,33.5 3,35.7 3.282,35.982 ; 15.3,35.5 15.6,35.2 15.6,29.5 ; 16,32.959 16,34.8 16.2,35
Board:
  the board outline again, w0.1
Plata:
  lines w0.254: 20,0 0,0 0,40 20,40 ; 20,0 20,40 ; 20,0 40,0 40,40 20,40

## Text inside footprints (layer, text, board x,y; h text height)
J1: Top Overlay "9." at 12.2,4.4 h1; Top Overlay "1" at 6.9,4.5 h1